# Altium PCB PCB_MyFirstCPU_2022-09-18.pcbdoc (part 2 of 2)
Units mil, origin at the board's own origin, x right, y up, seen from the top; angles counter-clockwise.
Board outline 4755 x 3745 mil, 2 copper layers (Top Layer, Bottom Layer); 117 components, 142 nets, 496 pads, 228 vias.
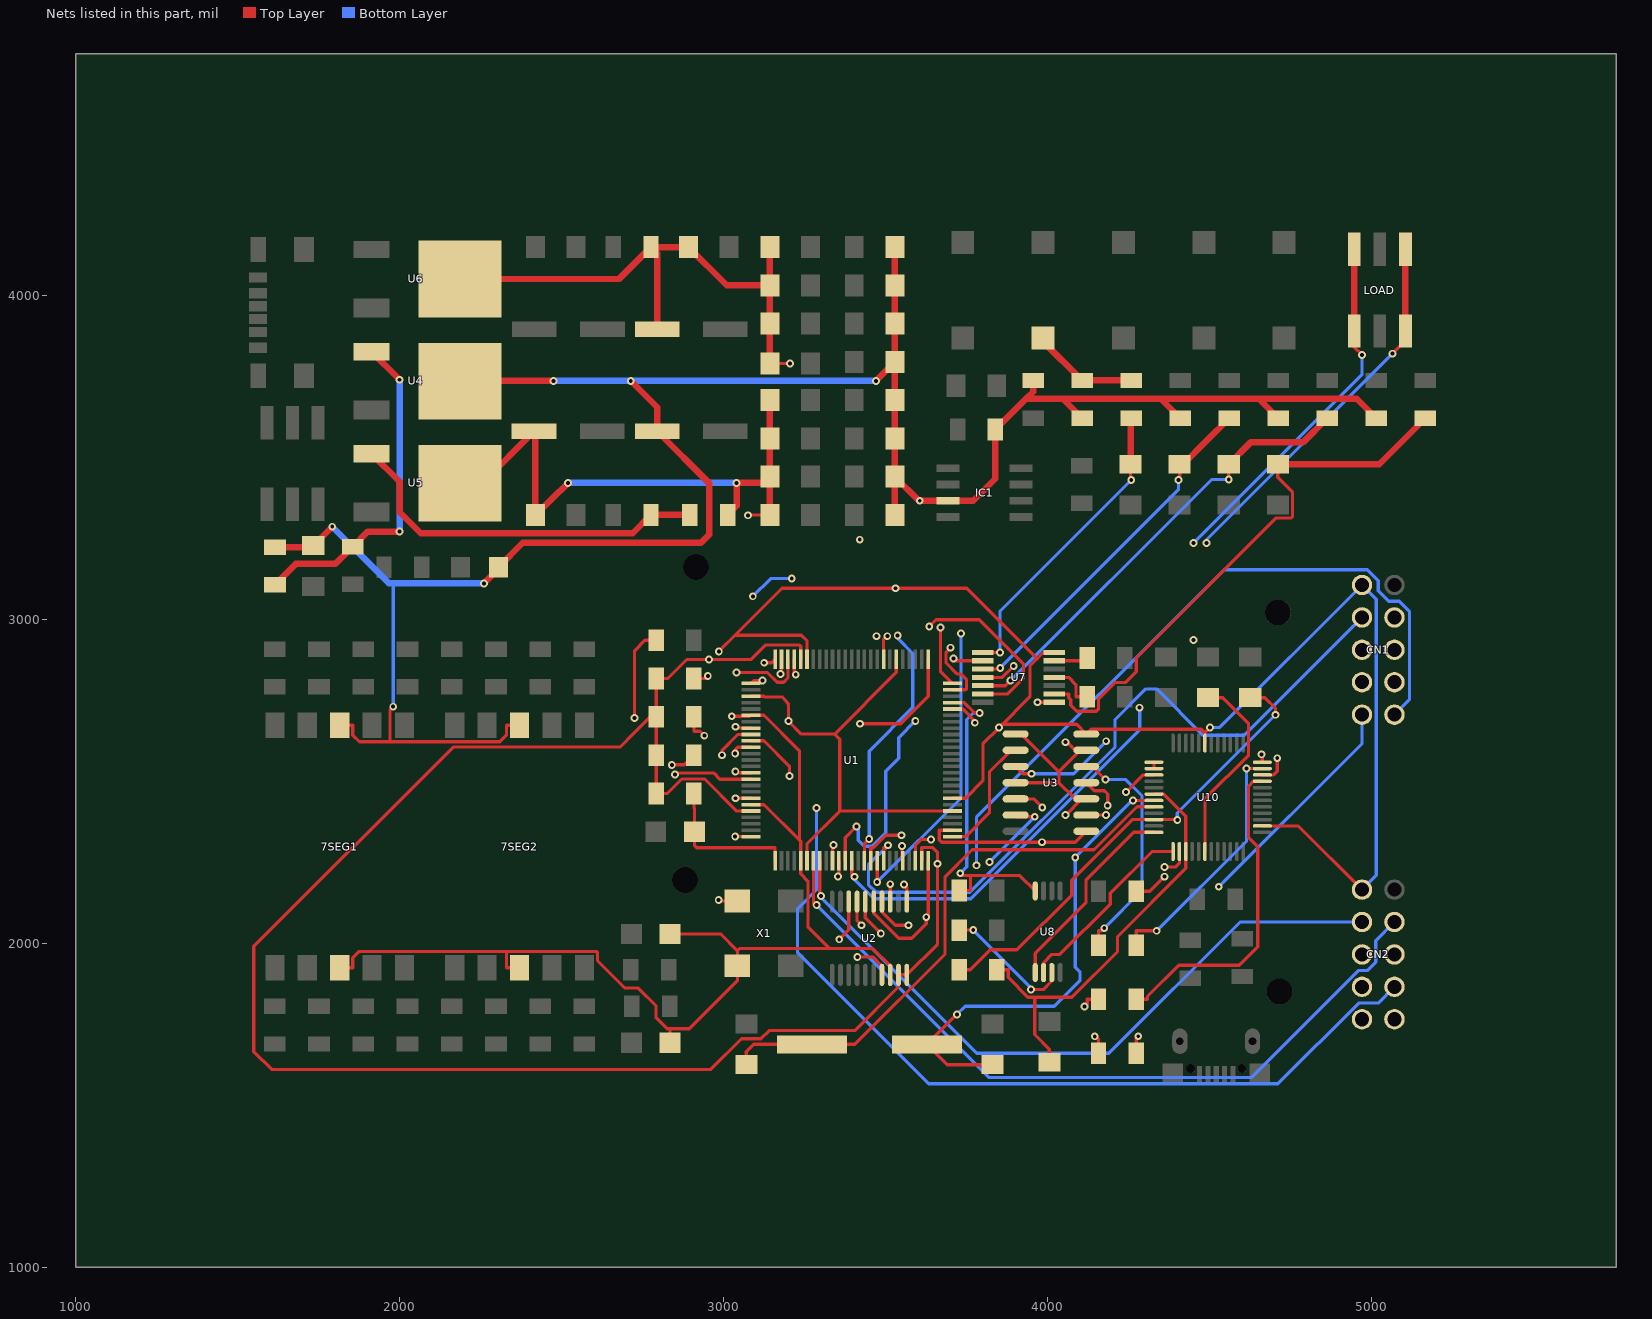
[diagram p2: the nets of this part, all layers, seen from the top]

## Via types
v1: diameter 24, hole 12, Top Layer to Bottom Layer, tented both sides, 228 vias

## Nets (pads, with @x,y where several pads share a name; then routed paths per layer and width w, separated by ;. In a path a pad name is that pad's centre, name@x,y a point inside that pad or via, vN(x,y) a via of type N, cw(c..) or ccw(c..) an arc to the next point about the centre after c; other vN are vias at no path point) (continued)
SW1_2: R43.1 R47.1 SW1.2 | length 664.7
  Top Layer w10: SW1.2@3985.79,3867.36 3985.8,3856.7 R47.1@4106.25,3736.21 ; R47.1@4106.25,3736.21 R43.1@4257.5,3736.21
  Top Layer w20: SW1.2@3985.79,3867.36 3985.8,3856.7 R47.1@4106.25,3736.21 ; R47.1@4106.25,3736.21 R43.1@4257.5,3736.21
SW_1_IN: U1.22 U7.2 | length 650.4
  Top Layer w10: U1.22@3217.84,2876.02 3217.83,2832.94 v1(3222.35,2828.42) ; v1(3709.28,2878.19) 3716.29,2871.18 U7.2@3799.76,2871.18
  Mid-Layer 1 w10: v1(3222.35,2828.42) 3272.12,2878.19 v1(3709.28,2878.19)
SW_2_IN: U1.23 U7.4 | length 1618
  Top Layer w10: v1(3040,2835) 3135,2835 3165,2805 3185,2805 3198.15,2818.15 U1.23@3198.15,2876.02 ; U7.4@3799.76,2820 3860,2820 v1(3895,2855)
  Mid-Layer 2 w10: v1(3040,2835) 3040,3020 v1(3090,3070) ; v1(3210,3125) 3685,3125 3690,3120 3765,3120 3895,2990 3895,2965 v1(3895,2855)
  Bottom Layer w10: v1(3090,3070) 3145,3125 v1(3210,3125)
SW_3_IN: U1.24 U7.6 | length 1130.1
  Top Layer w10: v1@3178.46,2835.48 3178.46,2833.46 v1(3175,2830) 3178.5,2830 U1.24@3178.46,2876.02 ; v1(3634.53,2977.36) 3655.2,2998 3788.5,2998 3925,2861.6 3925,2816.8 3877,2768.8 U7.6@3799.76,2768.82
  Mid-Layer 2 w10: v1(3175,2830) 3175,2843.25 3309.11,2977.36 v1(3634.53,2977.36)
SW_4_IN: U1.26 U7.8 | length 973.4
  Top Layer w10: U1.26@3083.98,2801.22 3092.76,2810 v1(3120,2810) ; v1(3968.63,2743.23) U7.8@4020.24,2743.23
  Mid-Layer 1 w10: v1(3120,2810) 3120,2800 3853.3,2800 3910,2743.2 v1(3968.63,2743.23)
TCK: U1.77 U2.6 U3.8 | length 1272.4
  Top Layer w10: U2.6@3437.2,2128.03 3437.2,2077.8 v1(3485,2030) ; U1.77@3706.02,2348.46 3665.48,2348.46 3665.43,2348.41 3665.43,2337.19 3665.43,2318.7 3672.66,2311.47 v1(3982.17,2311.47) 4085.49,2311.47 U3.8@4119.02,2345
  Mid-Layer 2 w10: v1(3485,2030) 3700.7,2030 v1(3982.17,2311.47)
TCK_FTDI: R8.2 U10.24 | length 1107.9
  Top Layer w10: R8.2@4273.22,1660 4273.22,1706.38 v1(4279.29,1712.45) ; v1(4660.11,2582.49) 4662.32,2580.28 U10.24@4662.32,2558.27
  Mid-Layer 2 w10: v1(4279.29,1712.45) 4660.11,2093.27 v1(4660.11,2582.49)
TDI: U2.4 U3.11 | length 1014
  Top Layer w10: U2.4@3488.39,2128.03 3488.39,2096.61 3530,2055 v1(3570,2055) ; U3.11@4119.02,2495 4144.02,2470 4175,2470 4185,2460 v1(4185,2425)
  Mid-Layer 2 w10: v1(3570,2055) 3660,2055 3710,2105 4030,2425 v1(4185,2425)
TDI_FTDI: R7.2 U10.23 | length 771.9
  Top Layer w10: R7.2@4273.22,1993.33 4273.22,2037.82 v1(4336.25,2037.82) ; v1(4613.56,2538.58) U10.23@4662.32,2538.58
  Bottom Layer w10: v1(4336.25,2037.82) 4613.56,2315.13 v1(4613.56,2538.58)
TDIO: U1.100 U2.17 | length 1427.5
  Top Layer w10: v1(3412.45,1957.45) 3460.21,1957.45 3488.39,1929.27 U2.17@3488.39,1901.97 ; v1(3668.75,2973.82) 3668.75,2838.49 U1.100@3706.02,2801.22
  Mid-Layer 2 w10: v1@3412.5,1957.5 3450,1995 3450,2237 3483.5,2270.6 3483.5,2548.6 3597.6,2662.7 3601.1,2662.7 3614.6,2676.2 3614.6,2679.7 3668.8,2733.8 v1(3668.75,2973.82)
TDO: U1.76 U3.2 | length 378.8
  Top Layer w10: U1.76@3706.02,2328.78 3746.56,2328.78 ; 3746.6,2328.8 3820,2402.2 3820,2527.9 3887.1,2595 U3.2@3900.98,2595
TDO_FTDI: U3.3 U10.22 | length 971.4
  Top Layer w10: U3.3@3900.98,2545 3923.49,2522.49 v1(3949.93,2522.49) ; U10.22@4662.32,2518.9 4697.18,2518.9 4708.34,2530.06 v1(4708.34,2570.58)
  Mid-Layer 1 w10: v1(4180.41,2623.2) 4655.72,2623.2 v1(4708.34,2570.58)
  Bottom Layer w10: v1(3949.93,2522.49) 4079.7,2522.49 v1(4180.41,2623.2)
TMS: U1.75 U2.5 U3.6 | length 996.1
  Top Layer w10: U2.5@3462.8,2128.03 3462.79,2092.21 3540,2015 3580,2015 3625,2060 v1(3625,2080) 3631.22,2086.22 U1.75@3631.22,2253.98 ; U3.6@3900.98,2395 3905.98,2390 v1(3960,2390)
  Mid-Layer 1 w10: v1(3625,2080) 3695,2080 3820,2205 v1(3820,2250)
  Bottom Layer w10: v1(3820,2250) v1(3960,2390)
TMS_FTDI: R9.1 U10.21 | length 1003.6
  Top Layer w10: R9.1@4273.22,1826.67 4308,1826.67 4308,1835.37 4404.24,1931.61 4591.3,1931.61 4648.38,1988.69 4648.38,2296.62 4619.77,2325.23 4619.77,2484.37 4634.61,2499.21 U10.21@4662.32,2499.21
TX: U1.71 U10.39 | length 915.4
  Top Layer w10: v1(3550,2300) 3550,2256.46 U1.71@3552.48,2253.98 ; v1(4241.95,2466.17) 4294.68,2518.9 U10.39@4327.68,2518.9
  Mid-Layer 1 w10: v1(3550,2300) 3716.17,2466.17 v1(4241.95,2466.17)
U1_1: R2.1 U1.1 U2.7 | length 1727.9
  Top Layer w10: R2.1@2908.22,2698.11 2908.22,2653.62 2926.94,2653.62 v1(2940.38,2640.18) ; U2.7@3411.61,2128.03 3411.61,2068.39 v1(3425,2055) ; v1(3420.9,2676.9) 3546.9,2676.9 3631.2,2761.2 U1.1@3631.22,2876.02
  Mid-Layer 1 w10: v1(2940.38,2640.18) 3384.18,2640.18 v1(3420.9,2676.9)
  Mid-Layer 2 w10: v1(3420.9,2676.9) 3420.9,2495.9 3315,2390 3315,2165 v1(3425,2055)
U1_25: R3.1 U1.25 U2.8 | length 2102.3
  Top Layer w10: v1(2840,2550) 2878.22,2550 R3.1@2908.22,2580 ; v1(3125,2865) 3147.76,2865 U1.25@3158.78,2876.02 ; v1(3356.53,2011.53) 3386.02,2041.02 U2.8@3386.02,2128.03
  Mid-Layer 2 w10: 2735,2382.48 2735,2440 2840,2545 v1(2840,2550) ; v1(3125,2865) 3070,2810 3070,2530 2990,2450 2858.59,2450 2790,2450 2735,2395 2735,2230 2975,1990 3335,1990 v1(3356.53,2011.53)
U1_44: U1.44 U2.1 | length 734.5
  Top Layer w10: v1(3036.21,2446.89) U1.44@3083.98,2446.89 ; v1(3556.23,2180.87) 3565.16,2171.94 U2.1@3565.16,2128.03
  Mid-Layer 1 w10: v1(3036.21,2446.89) 3290.22,2446.88 v1(3556.23,2180.87)
U1_50: U1.50 U2.3 | length 646.1
  Top Layer w10: v1(3035.51,2328.78) U1.50@3083.98,2328.78 ; U2.3@3513.98,2128.03 v1(3513.98,2181.82)
  Mid-Layer 1 w10: v1(3035.51,2328.78) 3045,2335 3360.8,2335 v1(3513.98,2181.82)
U1_51: DONE.2 R4.2 U1.51 | length 453.6
  Top Layer w10: R4.2@2908.22,2461.89 2908.22,2417.4 2909.74,2415.88 DONE.2@2909.74,2343.78 2909.74,2301.27 2916.49,2294.52 3158.78,2294.52 U1.51@3158.78,2253.98
U1_99: R6.1 U1.99 | length 1041.9
  Top Layer w10: R6.1@2908.22,2816.22 2943,2816.22 v1(2951.15,2824.37) ; v1(3700.14,2911.71) 3686.22,2897.79 3686.22,2864.33 3719.76,2830.79 3730.95,2830.79 3749.47,2812.27 3749.47,2784.45 3746.56,2781.54 U1.99@3706.02,2781.54
  Mid-Layer 1 w10: v1(2951.15,2824.37) 3027.26,2900.48 3688.91,2900.48 v1(3700.14,2911.71)
U3_1: LOAD.1 LOAD.4 R1.2 U3.1 U3.4 U3.10 U3.13 | length 3429.3
  Top Layer w10: U3.4@3900.98,2495 4034.72,2495 ; U3.1@3900.98,2645 3918.56,2645 4034.72,2528.84 ; v1(4055,2395) 4105,2445 U3.10@4119.02,2445 4084.72,2445 4034.72,2495 ; v1@4055,2625 4085,2595 U3.13@4119.02,2595 4100.88,2595 4034.72,2528.84 ; R1.2@4273.22,2160 4315,2160 v1(4360,2205) ; v1@5060,3815 5103.74,3858.74 LOAD.1@5103.74,3889.02 LOAD.4@5103.74,4140.98 ; 4034.72,2495 4034.72,2528.84
  Top Layer w20: LOAD.1@5103.74,3889.02 LOAD.4@5103.74,4140.98
  Mid-Layer 2 w10: v1(4055,2395) 4145,2395 4335,2205 v1(4360,2205) ; v1(4055,2620) 4490,3055 v1(4490,3235)
  Bottom Layer w10: v1(4490,3235) 4490,3245 v1(5063.91,3818.91)
U3_5: R9.2 U3.5 | length 822.1
  Top Layer w10: U3.5@3900.98,2445 3956.65,2445 v1(3983.01,2418.64) ; v1(4113.75,1804.26) 4122,1812.51 4122,1826.67 R9.2@4156.78,1826.67
  Mid-Layer 1 w10: v1(3983.01,2418.64) 4113.74,2287.91 v1@4113.74,1804.26
U3_9: R8.1 U3.9 | length 817.7
  Top Layer w10: U3.9@4119.02,2395 v1(4180,2395) ; v1(4145.01,1712.28) 4152.8,1704.49 4156.78,1704.49 R8.1@4156.78,1660
  Mid-Layer 1 w10: v1(4145.01,1712.28) 4145.01,2360.01 v1(4180,2395)
U3_12: R7.1 U3.12 | length 731.6
  Top Layer w10: U3.12@4119.02,2545 4137.9,2545 v1(4178.42,2504.53) ; R7.1@4156.78,1993.33 4156.78,2037.82 4166.24,2037.82 v1(4174.53,2046.11)
  Bottom Layer w10: v1(4174.53,2046.11) 4291.02,2162.6 4291.02,2454.07 4240.56,2504.53 v1(4178.42,2504.53)
U4_1: R13.2 R14.2 U4.1 | length 2088.1
  Top Layer w10: R13.2@1615.24,3105.52 1679.72,3170 1801.78,3170 R14.2@1855,3223.22 1901.78,3270 v1(2000,3270) ; U4.1@1913.19,3825.2 v1(2000,3738.38)
  Top Layer w19.84: R13.2@1615.24,3105.52 1679.72,3170 1801.78,3170 R14.2@1855,3223.22 1901.78,3270 v1(2000,3270) ; U4.1@1913.19,3825.2 v1(2000,3738.38)
  Bottom Layer w10: v1(2000,3270) v1(2000,3738.38)
  Bottom Layer w19.84: v1(2000,3270) v1(2000,3738.38)
  other v1: 2000,3270 2000,3738.38
U5_1: R16.2 R17.2 U5.1 | length 2323.9
  Top Layer w10: U5.1@1913.19,3510.24 2000,3423.4 2000,3330 2065,3265 2719.6,3265 R17.2@2775.82,3321.22 R16.2@2895.6,3321.22
  Top Layer w19.84: U5.1@1913.19,3510.24 2000,3423.4 2000,3330 2065,3265 2719.6,3265 R17.2@2775.82,3321.22 R16.2@2895.6,3321.22
U7_1: C35.2 R43.2 U7.1 | length 1088
  Top Layer w10: U7.1@3799.76,2896.77 v1(3852.81,2896.77) ; R43.2@4257.5,3619.78 4255.85,3618.12 C35.2@4255.85,3477.7 4255.85,3430.92 v1(4257.73,3429.04)
  Top Layer w20: C35.2@4255.85,3477.7 4255.85,3549.3 4255.85,3618.12 R43.2@4257.5,3619.78
  Bottom Layer w10: v1(3852.81,2896.77) 3852.81,3024.12 v1(4257.73,3429.04)
U7_3: C36.2 R45.2 U7.3 | length 1336.5
  Top Layer w10: U7.3@3799.76,2845.59 3844.24,2845.59 3847.8,2849.15 v1(3853.67,2849.15) ; v1(4403.48,3429.04) 4407.23,3432.79 C36.2@4407.23,3477.7 4417.93,3477.7 R45.2@4560,3619.78
  Top Layer w20: C36.2@4407.23,3477.7 4417.93,3477.7 4490.1,3549.87 R45.2@4560,3619.78
  Bottom Layer w10: v1(3853.67,2849.15) 4403.48,3398.96 v1(4403.48,3429.04)
U7_5: C37.2 R48.2 U7.5 | length 1795.1
  Top Layer w10: U7.5@3799.76,2794.41 3869.41,2794.41 v1(3885,2810) ; v1(4558.61,3430.39) 4558.61,3437.46 C37.2@4558.61,3477.7 4625.91,3545 4787.72,3545 R48.2@4862.49,3619.78
  Top Layer w20: C37.2@4558.61,3477.7 4625.91,3545 4701.2,3545 4787.72,3545 R48.2@4862.49,3619.78
  Bottom Layer w10: v1(3885,2810) 4505.38,3430.38 v1(4558.61,3430.39)
U7_9: C38.2 R50.1 U7.9 | length 2274.6
  Top Layer w10: U7.9@4020.24,2768.82 4064.72,2768.82 4064.72,2757.74 4071.27,2751.19 4071.27,2733.32 4089.13,2715.46 4150.12,2715.46 4156.61,2721.95 4156.61,2752.93 4208.22,2804.54 4240.64,2804.54 4273.05,2836.95 4273.05,2879.87 4705.2,3312.02 4752.17,3312.02 4755.08,3314.93 4755.08,3392.38 4710,3437.46 C38.2@4710,3477.7 5022.93,3477.7 R50.1@5165,3619.78
  Top Layer w20: C38.2@4710,3477.7 4803.83,3477.7 5022.93,3477.7 R50.1@5165,3619.78
U7_11: R52.2 U7.11 | length 148.5
  Top Layer w10: U7.11@4020.24,2820 4064.72,2820 4087,2797.72 4087,2760 R52.2@4121.78,2760
U7_13: R51.2 U7.13 | length 105.2
  Top Layer w10: U7.13@4020.24,2871.18 4112.96,2871.18 R51.2@4121.78,2880
U10_1: U8.2 U10.1 | length 591.9
  Top Layer w10: U8.2@3987.2,1909 3987.21,1939.61 4012.47,1964.87 4037.74,1964.87 4192.96,2120.09 4192.96,2153.65 4321.99,2282.68 U10.1@4386.73,2282.68
U10_2: R39.2 U8.3 U10.2 | length 1139.8
  Top Layer w10: R39.2@3726.78,2040 v1(3770.12,2040) ; v1(3948.32,1856.45) 3986.29,1856.45 4012.81,1882.97 U8.3@4012.8,1909 ; v1(4360,2235) 4395,2235 4406.42,2246.42 U10.2@4406.42,2282.68
  Mid-Layer 2 w10: v1@3948.3,1856.5 3949.8,1855 4070,1855 4390,2175 4390,2210 4365,2235 v1(4360,2235)
  Bottom Layer w10: v1(3770.12,2040) 3948.32,1861.8 v1(3948.32,1856.45)
U10_6: C31.2 U10.6 | length 608.6
  Top Layer w10: U10.6@4485.16,2282.68 4485.2,2445.2 4620,2580 4620,2677.3 4540,2757.3 ; C31.2@4495,2757.3 4540.03,2757.3
U10_38: U10.37 U10.38 | length 19.7
  Top Layer w10: U10.38@4327.68,2538.58 U10.37@4327.68,2558.27
U10_42: FB1.2 R38.1 U10.3 U10.42 | length 1330.6
  Top Layer w10: R38.1@3843.22,1917.5 3878,1917.5 3878,1894.17 3938.97,1833.2 3959.71,1833.2 ; FB1.2@4005,1632.3 4005,1672.55 3959.71,1717.84 3959.71,1833.2 ; U10.42@4327.68,2459.84 4358.12,2459.84 4426.1,2391.86 U10.3@4426.1,2282.68 4426.1,2230.44 4215.34,2019.68 4215.34,1973.74 4074.8,1833.2 3959.71,1833.2
U10_43: C34.2 U10.43 X3.1 | length 1484.5
  Top Layer w10: v1(3720,1780) 3719.67,1780 X3.1@3627.17,1687.5 3689.86,1624.8 C34.2@3830,1624.8 ; v1(4263,2440.16) U10.43@4327.68,2440.16
  Bottom Layer w10: v1(3720,1780) 3745,1805 4020,1805 4100,1885 4100,1910 4085.08,1924.92 v1(4085.08,2264.45) 4260.79,2440.16 v1(4263,2440.16)
U10_44: C33.2 U10.44 X3.2 | length 1750.6
  Top Layer w10: C33.2@3070,1624.81 3070,1665.05 3092.45,1687.5 X3.2@3272.84,1687.5 ; X3.2@3272.84,1687.5 3404.5,1687.5 3683.3,1966.3 3683.3,2204.7 3766.4,2287.8 4142.8,2287.8 4275.5,2420.5 U10.44@4327.68,2420.47
U10_46: C30.1 R38.2 U10.46 | length 1453.9
  Top Layer w10: R38.2@3726.78,1917.5 3761.56,1917.5 ; 3761.6,1917.5 3823.2,1979.1 3904.9,1979.1 4073.9,2148.1 4073.9,2193.9 4261.1,2381.1 U10.46@4327.68,2381.1 4398.9,2381.1 v1(4400,2380) ; C30.1@4625,2757.3 4670.03,2757.3 4702.92,2724.41 v1(4702.92,2704.31)
  Bottom Layer w10: v1(4400,2380) 4400,2401.39 v1(4702.92,2704.31)
U10_48: U8.1 U10.48 | length 621
  Top Layer w10: U8.1@3961.6,1909 3961.61,1968.04 4117.9,2124.33 4117.9,2194.5 4265.13,2341.73 U10.48@4327.68,2341.73
VCCAUX: C5.2 C6.2 C7.2 C8.2 C26.2 C27.1 LOAD.3 LOAD.6 R2.2 R3.2 R4.1 R6.2 R16.1 U1.21 U1.46 U1.74 U1.96 U2.19 U2.20 U5.4 | length 13672.9
  Top Layer w10: U5.4@2186.81,3419.4 2254.65,3419.41 C27.1@2414.88,3579.64 2418.68,3575.84 C26.2@2418.68,3321.22 ; C26.2@2419,3321.22 v1(2520,3420) ; R16.1@3012.04,3321.22 3040,3349.18 v1(3040,3420) 3122.97,3420 C8.2@3142.3,3439.33 ; v1(3075,3320) 3076.22,3321.22 C7.2@3142.3,3321.22 C8.2@3142.3,3439.33 ; U1.46@3083.98,2407.52 3043.44,2407.52 3040.53,2407.52 2941.62,2506.43 2871.1,2506.43 2826.56,2461.89 R4.1@2791.78,2461.89 R3.2@2791.78,2580 R2.2@2791.78,2698.11 ; C6.2@3142.3,3675.55 C5.2@3142.3,3557.44 C8.2@3142.3,3439.33 ; U1.21@3237.52,2876.02 3237.52,2916.56 3234.32,2919.76 3127.97,2919.76 3083.21,2875 v1(2955,2875) 2885.34,2875 2826.56,2816.22 R6.2@2791.78,2816.22 R2.2@2791.78,2698.11 ; U2.19@3539.57,1901.97 U2.20@3565.16,1901.97 3660,1996.81 v1(3660,2245) 3660,2279.29 3644.13,2295.16 3612.17,2295.16 3611.53,2294.52 U1.74@3611.54,2253.98 ; U2.19@3539.57,1901.97 3539.6,1864.6 3405,1730 3140,1730 3115,1705 3055,1705 2960,1610 1605,1610 1550,1665 1550,1990 2165,2605 2680,2605 2724.22,2649.22 2773.1,2698.1 R2.2@2791.78,2698.11 ; U1.96@3706.02,2722.48 3737.5,2722.5 3775,2685 v1(3775,2680) ; LOAD.6@4946.26,4140.98 LOAD.3@4946.26,3889.02 4946.26,3838.74 v1(4970,3815)
  Top Layer w19.84: U5.4@2186.81,3419.4 2254.65,3419.41 C27.1@2414.88,3579.64 2418.68,3575.84 C26.2@2418.68,3321.22 ; C26.2@2419,3321.22 v1(2520,3420) ; R16.1@3012.04,3321.22 3040,3349.18 v1(3040,3420) 3122.97,3420 C8.2@3142.3,3439.33 ; C7.2@3142.3,3321.22 C6.2@3142.3,3675.55
  Top Layer w20: LOAD.3@4946.26,3889.02 LOAD.6@4946.26,4140.98
  Mid-Layer 1 w10: v1(3075,3320) 3150,3245 v1(3420,3245)
  Mid-Layer 2 w10: v1(2955,2875) 2955,3000 2990,3035 2990.2,3235.2 v1(3075,3320) ; v1(3420,3245) 4440,3245 v1(4450,3235) ; 3593.53,3245 3665,3245 3695,3215 3950,2960 3950,2805 3825,2680 v1(3775,2680)
  Bottom Layer w10: v1(2520,3420) v1(3040,3420) ; v1(4450,3235) 4970,3755 v1(4970,3815)
  Bottom Layer w19.84: v1(2520,3420) 2555,3420 v1(3040,3420)
  other v1: 2520,3420 3040,3420 3040,3420
VCCINT: C1.2 C2.2 C3.2 C4.2 C28.1 C29.2 R19.1 U1.6 U1.28 U1.56 U1.80 U6.4 | length 5931.3
  Top Layer w10: U6.4@2186.81,4049.32 2677.16,4049.33 R19.1@2775.82,4147.99 C29.2@2891.12,4147.99 3009.23,4029.88 C1.2@3142.3,4029.88 ; U1.28@3083.98,2761.85 3124.52,2761.85 ; 3124.5,2761.9 3126.8,2759.6 3180.4,2759.6 3183.1,2756.9 3190,2750 3200,2737.1 v1(3200,2685) 3239.9,2645.1 3342.4,2645.1 ; C2.2@3142.3,4147.99 C1.2@3142.3,4029.88 ; v1(3205,3788.66) C3.2@3142.3,3788.66 C4.2@3142.3,3911.77 C1.2@3142.3,4029.88 ; U1.56@3257.21,2253.98 3257.21,2294.52 3257.21,2306.72 3358.01,2407.52 ; U1.6@3532.79,2876.02 3532.79,2835.48 3342.4,2645.09 ; U1.80@3706.02,2407.52 3358.01,2407.52 ; 3342.4,2645.09 3358.01,2629.47 3358.01,2407.52
  Top Layer w19.84: U6.4@2186.81,4049.32 2677.16,4049.32 R19.1@2775.82,4147.99 C29.2@2891.12,4147.99 3009.23,4029.88 C1.2@3142.3,4029.88 ; C3.2@3142.3,3788.66 C2.2@3142.3,4147.99
  Top Layer w20: R19.1@2775.82,4147.99 2794.88,4128.93 C28.1@2794.88,3894.61
  Mid-Layer 1 w10: v1(3205,3788.66) 3475,3515 v1@3475.47,2949.09
  Mid-Layer 2 w10: v1(3200,2685) 3200,2730 3360,2890 3420,2890 v1@3475.47,2949.09
  other v1: 3471.54,2947.09
VCCO: 7SEG1.3 7SEG1.8 7SEG2.3 7SEG2.8 C9.2 C10.2 C11.2 C12.2 C13.2 C14.2 C15.2 C16.2 C23.2 C25.1 CN1.10 CN2.10 IC1.7 LED1.2 LED2.2 POWER.1 R10.2 R11.2 R13.1 R40.2 R44.2 R46.2 R47.2 R49.2 U1.8 U1.20 U1.31 U1.45 U1.55 U1.73 U1.82 U1.97 U2.18 U3.14 U4.4 U7.14 U8.8 U10.14 U10.31 X1.4 | length 24011.3
  Top Layer w10: R13.1@1615.24,3221.96 1728.87,3221.96 C23.2@1733.35,3226.44 v1(1791.91,3285) ; 7SEG1.3@1815,1923.96 1855.54,1923.96 1855.54,1954.36 1875.57,1974.39 2329.46,1974.39 ; 7SEG1.8@1815,2671.98 1855.54,2671.98 1855.54,2641.58 1876.09,2621.03 1970.46,2621.03 ; v1(1980.08,2729.64) 1970.46,2720.02 1970.46,2621.03 ; U4.4@2186.81,3734.36 2187.45,3735 v1(2475,3735) ; 7SEG2.3@2370,1923.95 2329.46,1923.95 2329.46,1974.39 ; 7SEG2.8@2370,2671.97 2329.46,2671.97 2329.46,2641.57 2308.92,2621.03 1970.46,2621.03 ; LED1.2@2834.74,1693.06 2834.74,1735.57 ; LED2.2@2834.74,2028.06 2990.71,2028.06 3042.33,1976.44 ; v1(2985,2900) 3035,2950 ; v1(3025,2700) 3081.18,2700 U1.31@3083.98,2702.8 3124.52,2702.8 3233.89,2593.43 3233.89,2317.83 ; U1.45@3083.98,2427.2 3124.52,2427.2 3237.52,2314.2 U1.55@3237.52,2253.98 3237.5,2213.4 3260,2191 3260,2050 3327,1983 3290.5,1983 ; U1.20@3257.2,2876.02 3257.2,2932.8 3240,2950 3035,2950 ; v1(3470,3735) C14.2@3528.33,3793.65 ; U1.8@3493.43,2876.02 3493.42,2937.51 v1@3505,2949.09 ; U2.18@3513.98,1901.97 3513.98,1929.44 3460.45,1982.97 3263.73,1982.97 3048.86,1982.97 3042.33,1976.44 ; C10.2@3528.33,3321.21 C13.2@3528.33,3439.32 ; C15.2@3528.33,4147.98 C16.2@3528.33,4029.87 C9.2@3528.33,3911.76 3528.33,3793.65 C11.2@3528.33,3675.54 C12.2@3528.33,3557.43 C13.2@3528.33,3439.32 ; U1.73@3591.9,2254 3591.9,2301.9 3605,2315 3610,2320 v1(3640,2320) ; U1.82@3706.02,2446.89 3726.29,2446.89 3746.56,2446.89 ; U1.97@3706.02,2742.17 3742.8,2742.2 3775,2710 v1(3790,2710) ; R40.2@3726.78,2162.5 3761.56,2162.5 3761.56,2208.42 ; v1(3730.25,2215.5) 3737.33,2208.42 3761.56,2208.42 ; 3746.6,2446.9 3800,2500.3 3800,2615 v1(3850,2665) ; R11.2@3955,3736.21 3955,3701.78 3933.22,3680 ; U8.8@3961.6,2161 3914.19,2208.42 3761.56,2208.42 ; U7.14@4020.24,2896.77 3986.77,2896.77 3945,2855 3945,2760 v1(3850,2665) ; R47.2@4106.25,3619.77 4046.03,3680 ; R44.2@4408.75,3619.78 4348.53,3680 ; U10.31@4485.16,2617.32 4485.16,2649.22 ; v1(4500.88,2664.94) 4485.16,2649.22 ; U10.14@4662.32,2361.42 4773.58,2361.42 CN2.10@4970,2165 ; R46.2@4711.25,3619.78 4651.02,3680 ; R49.2@5013.75,3619.77 4953.52,3680 4651.02,3680 ; 2329.46,1974.39 2607.68,1974.39 2610.59,1971.48 2610.59,1945.98 2695.42,1861.15 2736.12,1861.15 2791.48,1805.79 2791.48,1769.64 2825.55,1735.57 2834.74,1735.57 ; 2834.74,1735.57 2894.34,1735.57 3042.33,1883.56 X1.4@3042.32,1930 3042.33,1976.44 ; 3035,2950 3180,3095 v1(3530,3095) ; C13.2@3528.33,3439.32 3602.65,3365 IC1.7@3692.8,3365 3770,3365 3838.22,3433.22 R10.2@3838.22,3585 3933.22,3680 ; v1(3530,3095) 3750,3095 ; v1(3530,3095) 3750,3095 ; 3750,3095 3967.5,2877.5 3750,3095 ; v1(3850,2665) 3860,2675 4060,2675 4089,2675 U3.14@4119.02,2645 4134.22,2660.2 4474.18,2660.2 4485.16,2649.22 ; 3933.22,3680 4015.23,3680 ; 4015.23,3680 4046.03,3680 ; 4015.23,3680 4046.03,3680 ; 4046.03,3680 4246.06,3680 ; 4246.06,3680 4348.53,3680 ; 4246.06,3680 4348.53,3680 ; 4348.53,3680 4566.43,3680 ; 4566.43,3680 4651.02,3680 ; 4566.43,3680 4651.02,3680
  Top Layer w19.84: R13.1@1615.24,3221.96 1728.87,3221.96 C23.2@1733.35,3226.44 v1(1791.91,3285) ; U4.4@2186.81,3734.36 2187.45,3735 v1(2475,3735) ; POWER.1@2304.98,3160 2380,3235 2930,3235 2955,3260 ; v1(3470,3735) C14.2@3528.33,3793.65 ; C10.2@3528.33,3321.21 C15.2@3528.33,4147.98
  Top Layer w20: v1(2260,3110) 2304.98,3154.98 POWER.1@2304.98,3160 ; v1(2713.17,3735) 2794.88,3653.28 C25.1@2794.88,3579.64 2955,3419.52 2955,3260 ; C13.2@3528.33,3439.32 3602.65,3365 IC1.7@3692.8,3365 3770,3365 3838.22,3433.22 R10.2@3838.22,3585 3933.22,3680 ; R11.2@3955,3736.21 3955,3701.78 3933.22,3680 ; R47.2@4106.25,3619.78 4046.03,3680 4015.23,3680 ; 4246.06,3680 4348.52,3680 R44.2@4408.75,3619.78 ; 4566.43,3680 4651.02,3680 R46.2@4711.25,3619.78 ; R49.2@5013.75,3619.78 4953.52,3680 4015.23,3680 ; 3933.22,3680 4015.23,3680
  Mid-Layer 1 w10: 3495,3053.9 3495,3060 v1(3530,3095) 3495,3130 3495,3154.39 ; v1@3505,2949.1 3495,2959.1 3495,3255 v1(3605,3365) ; v1(3790,2710) 3835,2665 v1(3850,2665)
  Mid-Layer 2 w10: v1(2985,2900) 2985,2740 v1(3025,2700) ; v1(3640,2320) 3730.25,2229.75 v1(3730.25,2215.5)
  Bottom Layer w10: v1(1791.91,3285) 1966.91,3110 1976.94,3110 ; v1(1980.08,2729.64) 1980.08,3106.86 1976.94,3110 ; v1(2260,3110) 1976.94,3110 ; v1(2475,3735) 2936.3,3735 v1(3470,3735) ; v1(3730.25,2215.5) 3750,2235.3 3750,2690 3770,2710 v1(3790,2710) ; v1(4500.88,2664.94) 4529.94,2664.94 CN1.10@4970,3105 5013.75,3061.25 5013.75,2208.75 CN2.10@4970,2165
  Bottom Layer w19.84: v1(1791.91,3285) 1966.91,3110 v1(2260,3110) ; v1(2475,3735) v1(2713.17,3735) v1(3470,3735)
  other v1: 3505,2947.09 1791.91,3285 2475,3735 3470,3735
VPORT_1_1: CN1.1 U1.60 | length 2810
  Top Layer w10: U1.60@3335.95,2253.98 3335.95,2294.52 3335.95,2299.66 v1(3338.8,2302.51)
  Mid-Layer 1 w10: v1(3338.8,2302.51) 3437.1,2204.2 3437.1,2188 3467.7,2157.4 3707.4,2157.4 3780,2230 v1(3780,2240)
  Bottom Layer w10: v1(3780,2240) 3780,2387.67 4544.28,3151.95 4986.2,3151.95 5020,3118.15 5020,3087.54 5052.54,3055 5084.82,3055 5116.36,3023.46 5116.36,2751.36 CN1.1@5070,2705
VPORT_1_2: CN1.2 U1.61 | length 2461.9
  Top Layer w10: v1(3352.71,2205.56) 3355.63,2208.48 U1.61@3355.63,2253.98
  Mid-Layer 1 w10: v1(3352.71,2205.56) 3877.7,1680.57 4207.05,1680.57 4527.91,2001.43 v1(4527.91,2173.75)
  Bottom Layer w10: v1(4527.91,2173.75) 4970,2615.84 CN1.2@4970,2705
VPORT_1_3: CN1.3 U1.62 | length 2259.7
  Top Layer w10: U1.62@3375.33,2253.98 3375.32,2325.32 v1(3410,2360)
  Mid-Layer 1 w10: v1(3591.55,2685.73) 3591.55,2664.42 3632.41,2623.56 3896.11,2623.56 3919.47,2646.92 4189.33,2646.92 4196.92,2639.33 4712.7,2639.33 4828.37,2755 5020,2755 CN1.3@5070,2805
  Bottom Layer w10: v1(3410,2360) 3415.2,2360 3415.2,2317.4 3434.1,2298.6 3458.6,2298.6 3500,2340 3500,2530 3540,2570 3540,2634.2 v1(3591.55,2685.73)
VPORT_1_4: CN1.4 U1.63 | length 1968.5
  Top Layer w10: U1.63@3395.01,2253.98 3395,2213.1 v1(3403.32,2204.78)
  Mid-Layer 1 w10: v1(4283.66,2726.59) 4619.04,2726.59 4697.45,2805 CN1.4@4970,2805
  Bottom Layer w10: v1(3403.32,2204.78) 3403.32,2197.66 3464,2136.98 3762.74,2136.98 4283.66,2657.9 v1(4283.66,2726.59)
VPORT_1_5: CN1.5 U1.65 | length 2364.1
  Top Layer w10: U1.65@3434.37,2253.98 3434.37,2306.99 v1(3449.01,2321.63)
  Mid-Layer 1 w10: v1@3543.5,2948.95 3705.1,2948.95 3734.1,2919.85 4359.3,2919.85 4418,2861.05 5032.8,2861.05 CN1.5@5076.5,2904.85
  Bottom Layer w10: v1(3449.01,2321.63) 3449.01,2592.31 3583.86,2727.16 3583.86,2893.73 3537.01,2940.58 v1(3537.01,2949.09)
VPORT_1_6: CN1.6 U1.66 | length 1847.6
  Top Layer w10: U1.66@3454.06,2253.98 3454.06,2294.52 3461.14,2294.52 3499.55,2332.93 v1(3548.77,2332.93)
  Mid-Layer 1 w10: v1@4451.5,2934.85 4941.5,2934.85 CN1.6@4971.5,2904.85
  Mid-Layer 2 w10: v1(3548.77,2332.93) 3610.84,2395 3623.4,2395 ; 3610,2395 3910,2395 v1(4450,2935)
VPORT_1_7: CN1.7 U1.67 | length 2305.7
  Top Layer w10: v1(3473.74,2188.66) U1.67@3473.75,2253.98
  Mid-Layer 1 w10: v1@3734.2,2954.9 3749.2,2969.9 4598.4,2969.9 4613.3,2955 5010.7,2955 CN1.7@5065.8,3010.1
  Bottom Layer w10: v1(3473.74,2188.66) 3732.7,2447.7 v1(3732.74,2955)
VPORT_1_8: CN1.8 U1.68 | length 2256.5
  Top Layer w10: U1.68@3493.43,2253.98 3493.43,2294.52 3499.95,2294.52 v1(3507.43,2302)
  Bottom Layer w10: v1(3507.43,2302) 3446.6,2241.17 3446.6,2180.5 3470.21,2156.89 3759.81,2156.89 4207.61,2604.69 4207.61,2688.85 4303.17,2784.41 4336.05,2784.41 4478.91,2641.55 4606.55,2641.55 CN1.8@4970,3005
VPORT_2_1: CN2.1 U1.33 | length 3068.8
  Top Layer w10: v1(3036.21,2667.52) 3040.3,2663.43 U1.33@3083.98,2663.43
  Mid-Layer 1 w10: v1@3036.2,2675 v1(3036.21,2667.52) 3028.73,2675 2855,2675 2830,2650 2830,2631.3 3007.9,2453.3 3007.9,2322.4 3683.5,1646.8 4951.7,1646.8 CN2.1@5070,1765
VPORT_2_2: CN2.2 U1.34 | length 2441
  Top Layer w10: v1(2995,2580) 2995,2595.3 3043.44,2643.74 U1.34@3083.98,2643.74
  Mid-Layer 1 w10: v1(2995,2580) 3018.95,2556.05 4185.97,2556.05 4970,1772.02 CN2.2@4970,1765
VPORT_2_3: CN2.3 U1.35 | length 2918.9
  Top Layer w10: U1.35@3083.98,2624.05 3124.52,2624.06 3202.95,2545.63 v1(3202.95,2515.56)
  Mid-Layer 2 w10: v1(3202.95,2515.56) 3286.22,2432.29 v1(3286.22,2416.48)
  Bottom Layer w10: v1(3286.22,2416.48) 3286.22,2163.83 3228.01,2105.62 3228.01,1970.54 3632.93,1565.62 4710.25,1565.62 4959.63,1815 5020,1815 CN2.3@5070,1865
VPORT_2_4: CN2.4 U1.36 | length 2296.1
  Top Layer w10: v1(3035.53,2584.77) 3035.53,2596.51 3043.39,2604.37 U1.36@3083.98,2604.37
  Mid-Layer 1 w10: v1(3035.53,2584.77) 3041.21,2579.09 4255.91,2579.09 CN2.4@4970,1865
VPORT_2_5: CN2.5 U1.40 | length 2535.3
  Top Layer w10: v1(3036.05,2529.32) 3039.74,2525.63 U1.40@3083.98,2525.63
  Mid-Layer 1 w10: v1(3036.05,2529.32) 3010.75,2529.32 2964.18,2575.89 2964.18,2591.87 2980.14,2607.83 3491.75,2607.83 3504.44,2595.14 4313.11,2595.14 4893.25,2015 5020,2015 CN2.5@5070,1965
VPORT_2_6: CN2.6 U1.41 | length 3426
  Top Layer w10: v1(2850,2520) 2855,2525 2968.7,2525 2987.8,2505.9 U1.41@3083.98,2505.94
  Mid-Layer 1 w10: v1(2850,2520) 2955.4,2414.6 2955.4,2129.34 3498.34,1586.4 4953.86,1586.4 5114.35,1746.89 5114.35,1787.85 5087.2,1815 5053.93,1815 5027.44,1841.49 5027.44,1907.56 CN2.6@4970,1965
VPORT_2_7: CN2.7 U1.57 | length 2387.7
  Top Layer w10: 3276.9,2213.4 3276.9,2117.3 v1(3287.04,2117.29) ; 3276.89,2213.44 U1.57@3276.89,2253.98
  Bottom Layer w10: v1(3287.04,2117.29) 3819.35,1584.98 4628,1584.98 4958.02,1915 4986.07,1915 5012.56,1941.49 5012.56,2007.56 CN2.7@5070,2065
VPORT_2_8: CN2.8 U1.58 | length 2151.3
  Top Layer w10: U1.58@3296.58,2253.98 3296.58,2148.42 v1(3300,2145)
  Bottom Layer w10: v1(3300,2145) 3300,2141.12 3781.15,1659.97 4188.83,1659.97 4593.86,2065 CN2.8@4970,2065
X1_3: R5.1 X1.3 | length 1024.7
  Top Layer w10: v1(2725,2695) 2725,2902.33 2757,2934.33 R5.1@2791.78,2934.33 ; v1(2984.46,2133.1) 2987.56,2130 2991.95,2130 X1.3@3042.32,2130
  Mid-Layer 1 w10: v1(2725,2695) 2740,2695 2984.5,2450.5 v1(2984.46,2133.1)
pads on no net: IC1.1 IC1.3 IC1.8 LOAD.2 LOAD.5 SW0.2 SW0.5 TYPE-C.A5 TYPE-C.B5 U1.13 U1.17 U1.18 U1.27 U1.30 U1.32 U1.38 U1.47 U1.48 U1.49 U1.69 U1.78 U1.79 U1.84 U1.88 U1.89 U1.98 U2.2 U2.9 U2.12 U2.13 U2.14 U2.15 U2.16 U7.10 U7.12 U8.6 U8.7 U10.4 U10.10 U10.11 U10.12 U10.13 U10.15 U10.16 U10.17 U10.19 U10.20 U10.26 U10.27 U10.28 U10.29 U10.30 U10.32 U10.33 U10.35 U10.36 U10.41 USB. USB.4 X1.1

## Silkscreen, mask and mechanical layers (free items; w line width, h text height)
Top Overlay:
  lines w19.84 net S$21989: 1510,4234.6 1510,3065 1510,3035 2690,3035 2645,3035
  lines w19.84 net S$25006: 1510,4234.6 1510.4,4235 3315,4235 3590,4235
  lines w19.84 net S$25016: 3590,3237.56 3590,4235
  lines w19.84 net S$25023: 2690,3035 2892.6,3237.6 3590,3237.6
  lines w20 net S$301442: 1510,2990 1510,1510 2935,1510 2935,2045 2690,2290 2688.7,2290 2688.7,2990
  lines w20 net S$323973: 1510,2938.66 1510,3035
  lines w20 net S$323990: 2688.7,2990 2688.8,3035
  lines w20 net S$324081: 3590,4235 5245,4235
  lines w20 net S$324085: 5245,3570 5245,3576.11 5245,4235
  lines w20 net S$325398: 5245,3456.6 5245,3586.22
  lines w20 net S$325420: 5245,3456.6 5245,3445 5175,3375 5050,3375 ; 5050,3375 5050,3375
  lines w20 net S$325424: 4755,3290 4840,3375 5050,3375 ; 5050,3375 5050,3375
  lines w20 net S$325428: 3590,3237.6 4702.6,3237.6 4789.49,3324.49
  lines w20 net S$326524: 4789.49,3324.49 4790,1620
  lines w20 net S$326531: 4790,1510 5245,1510
  lines w20 net S$326535: 5245,1620 5245,3434.66
  lines w20 net S$326622: 4790,1510 4790,1620
  lines w20 net S$326626: 5245,1510 5245,1620
  lines w20 net S$327107: 2935,1510 4790,1510
  text "SWITCH" at 4805,3395.63 h78.74
  text "Zhangzr / Jerry" at 4352.67,3081.62 h66.93 r356
  text "POWER" at 2370,3075.63 h78.74
  text "MyFirstCPU" at 3011.44,2922.34 h165.35 r1